# Altium PCB psb_mosdriver.PcbDoc
Units mm, origin at the board's own origin, x right, y up, seen from the top; angles counter-clockwise.
Board outline 92.9 x 66.54 mm, 2 copper layers (Top Layer, Bottom Layer); 20 components, 15 nets, 59 pads, 4 vias.
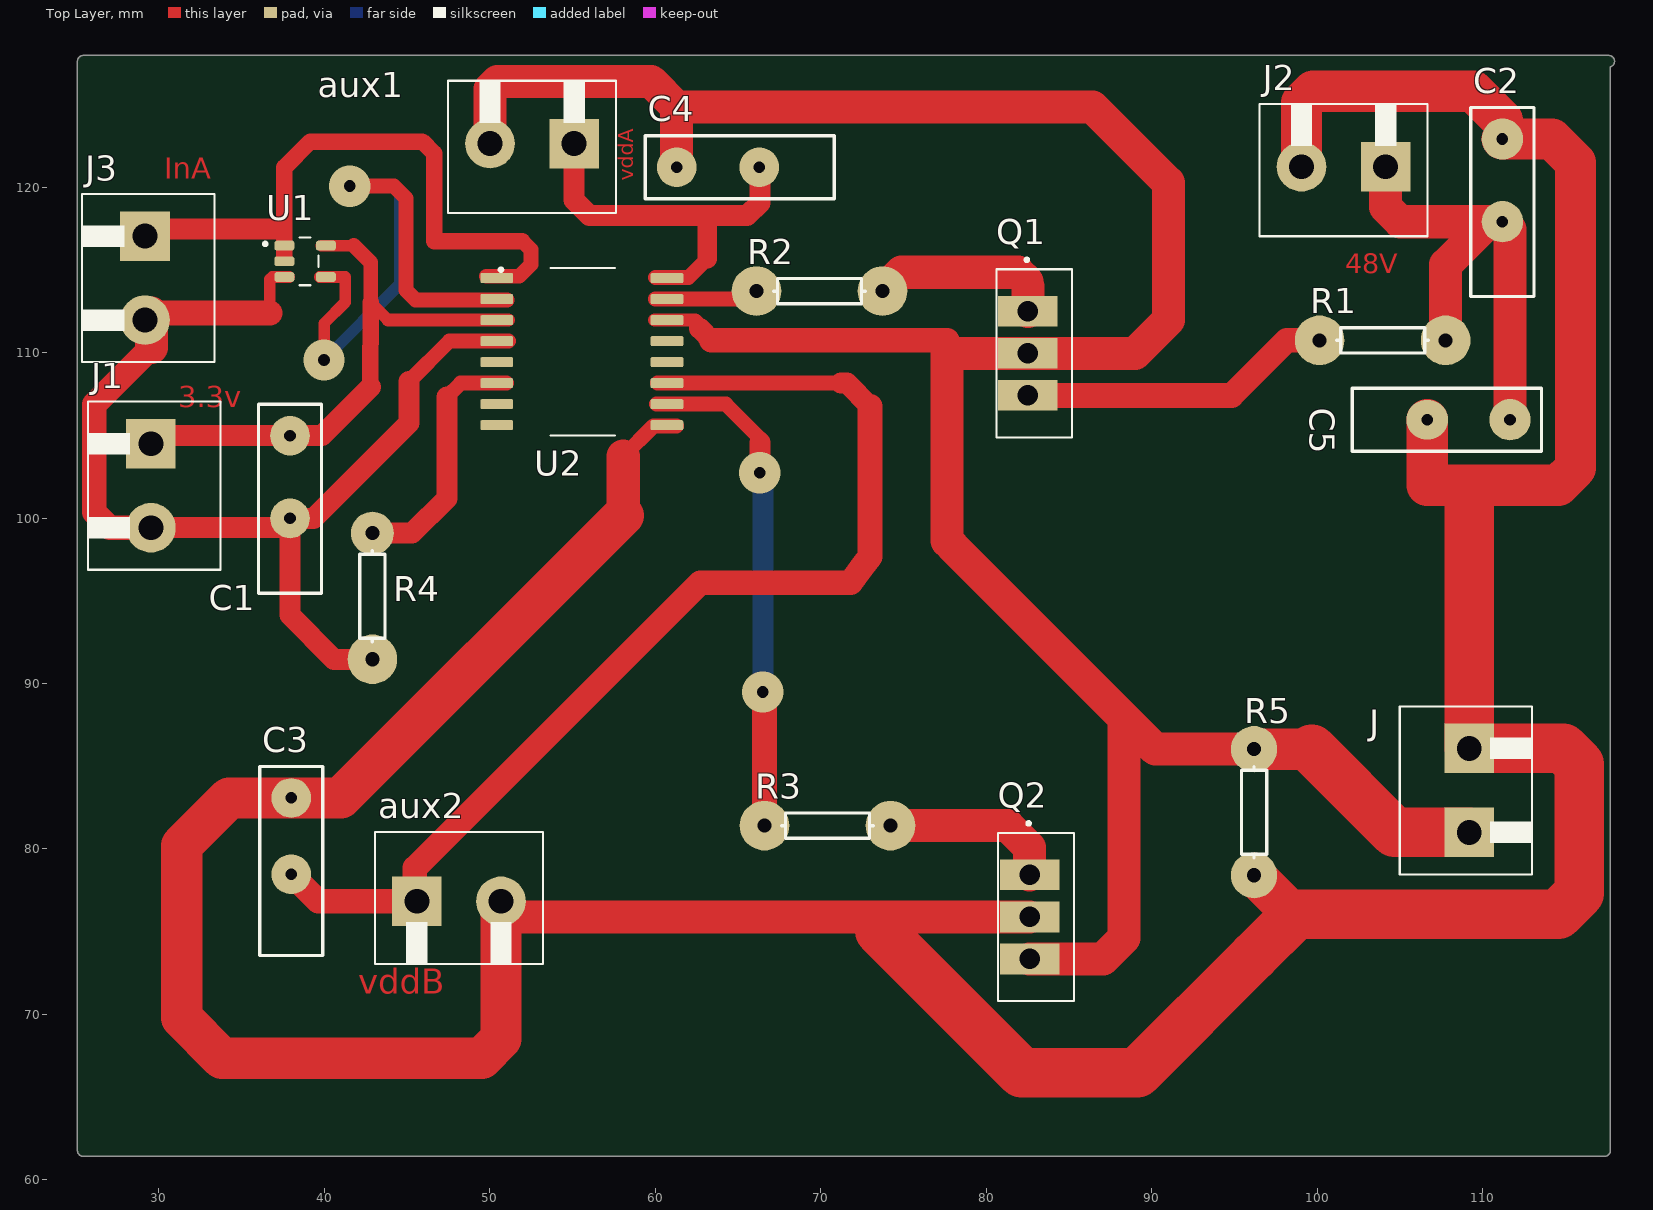
[diagram p0: Top Layer view]
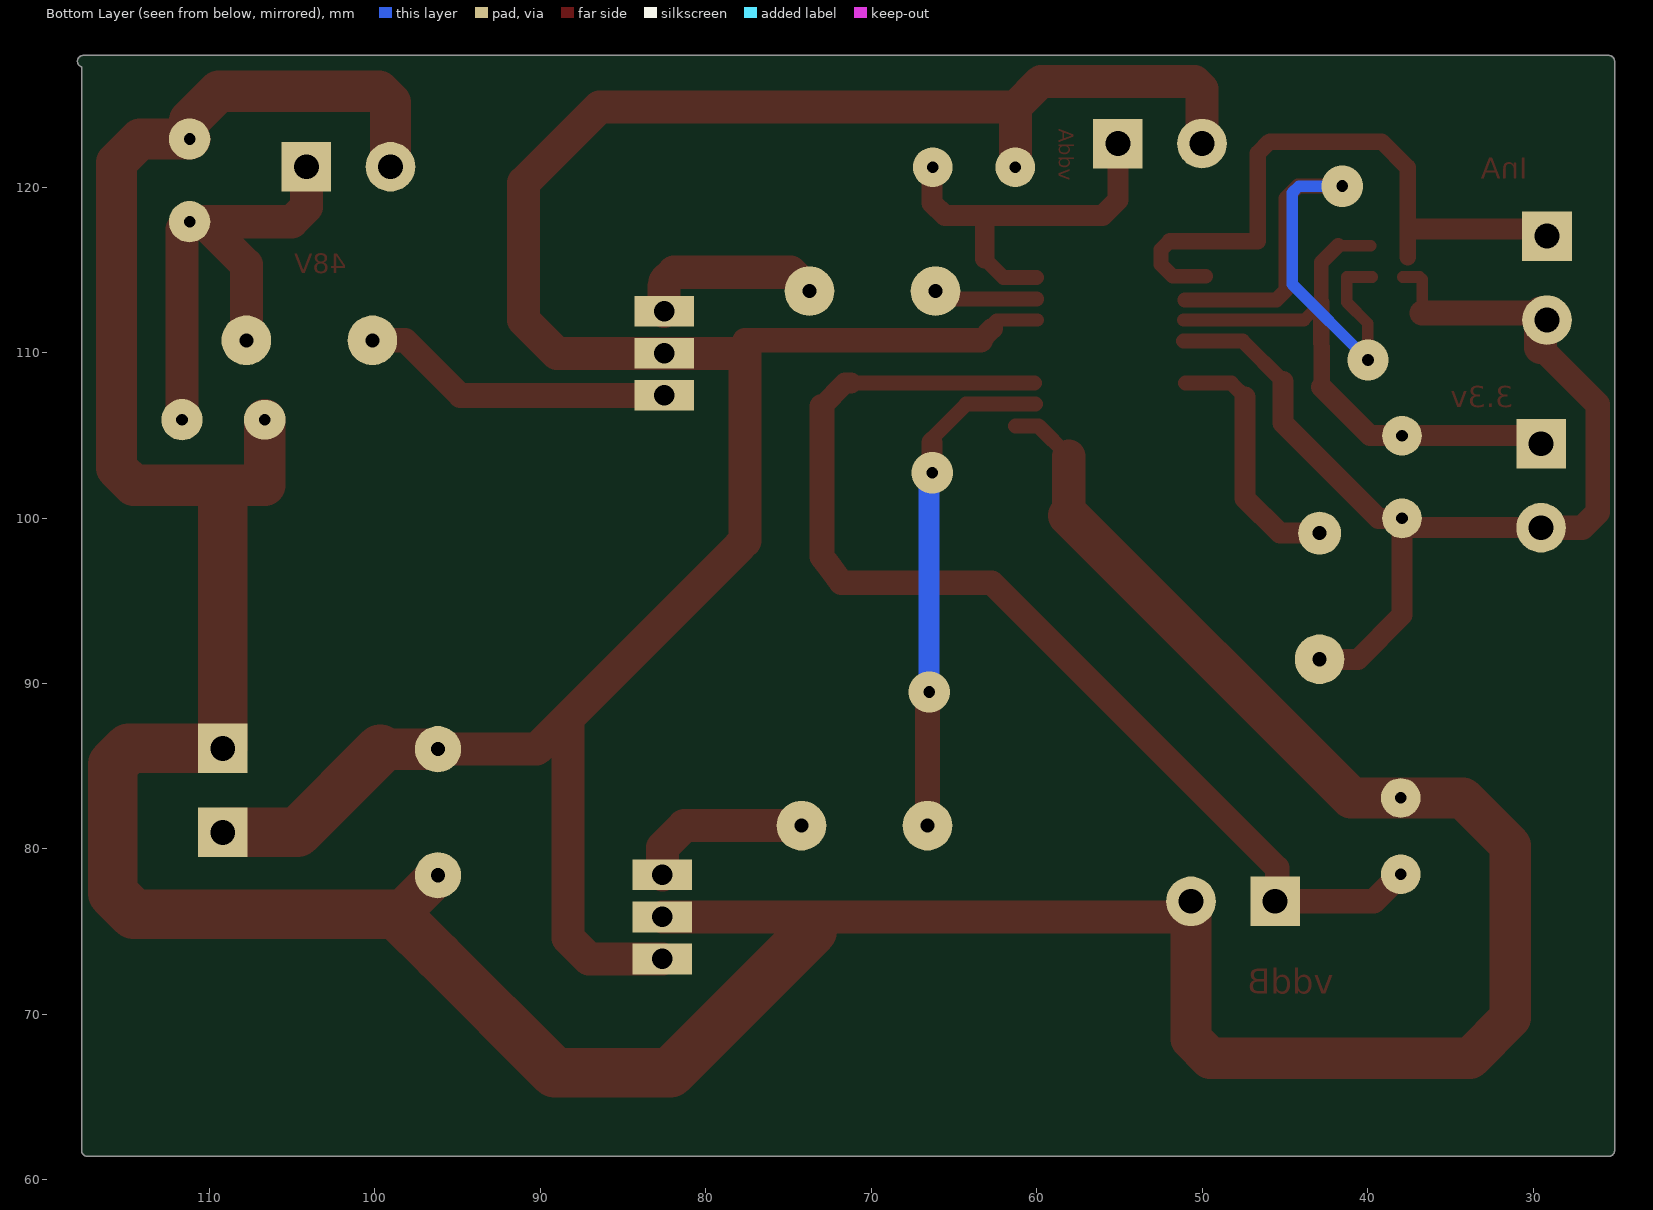
[diagram p1: Bottom Layer view, seen from below]

## Layer stack, top to bottom
Top Solder: solder mask 0.0102, Solder Resist, Dk 3.5
Top Layer: signal copper 0.0356
Dielectric 1: dielectric 0.32, FR-4, Dk 4.8
Bottom Layer: signal copper 0.0356
Bottom Solder: solder mask 0.0102, Solder Resist, Dk 3.5

## Board outline
25.425,61.422 cw(c25.425,61.773) 25.075,61.773 25.075,127.61 cw(c25.425,127.61) 25.425,127.96 117.627,127.96 cw(c117.627,127.61) 117.978,127.61 cw(c117.627,127.61) 117.724,127.273 117.724,61.773 cw(c117.373,61.773) 117.373,61.422

## Design rules (kind name [scope] priority, off if disabled: settings)
Clearance [All] p1: gap=0.254
PolygonConnect [All] p1: connectstyle=Relief reliefconductorwidth=0.254 reliefentries=4 polygonreliefangle="90 Angle" airgapwidth=0.254
RoutingVias [All] p1: holewidth=0.711 width=1.27 viastyle="Through Hole" minholewidth=0.711 minwidth=1.27 maxholewidth=0.711 maxwidth=1.27
SolderMaskExpansion [All] p1: expansion=0.102
Width [All] p1: maxlimit=3.5 minlimit=0.7 preferedwidth=0.7
30 further rules are at their usual default settings.

## Components (designator, comment, footprint, x,y, rotation, side; value= is the part's Value field where it differs from the comment)
aux1 "1760510000" 1760490000#1 55.093,122.631 r180 top
aux2 "1760510000" 1760490000#1 45.593,76.835 r0 top
C1 "Cap" RAD-0.3#1 37.922,101.168 r90 top
C2 "470uF" RAD-0.3#2 111.201,119.101 r270 top
C3 "1uF" RAD-0.3#3 37.998,79.273 r270 top
C4 "1uF" RAD-0.3#4 65.1,121.209 r0 top
C5 "Cap" RAD-0.3#5 107.848,105.943 r0 top
J "1760510000" 1760490000#2 109.195,81.001 r90 top
J1 "1760510000" 1760490000#1 29.515,104.496 r270 top
J2 "1760510000" 1760490000#1 104.14,121.234 r180 top
J3 "1760510000" 1760490000#1 29.159,117.043 r270 top
Q1 "mosfetss" tph3206_powmos 82.525,109.957 r270 top
Q2 "mosfetss" tph3206_powmos 82.626,75.895 r270 top locked
R1 "Res1" AXIAL-0.3#1 103.962,110.744 r0 top
R2 "Res1" AXIAL-0.3#1 69.926,113.716 r180 top
R3 "Res1" AXIAL-0.3#1 70.409,81.407 r180 top
R4 "Res1" AXIAL-0.3#2 42.901,95.275 r90 top
R5 "Res1" AXIAL-0.3#3 96.19,82.22 r90 top
U1 "SN74LVC1G00DBVR" SOT95P280X145-5N 38.837,115.519 r0 top locked
U2 "surface mount" 2eds8265h_pcb 55.626,110.185 r0 top

## Footprints (in the part's own frame and the unit in brackets; to place one, negate y for a bottom-side part, rotate by r counter-clockwise, add the part's x,y. Pads: shape width x height; smd on the part's side, far side on the other; paste and mask are expansions set on the pad)
2eds8265h_pcb [mm]
  rrect25% 1.97x0.6 smd: 1(-5.207,4.318) 2(-5.207,3.048) 3(-5.207,1.778) 4(-5.207,0.508) 5(-5.207,-0.762) 6(-5.207,-2.032) 7(-5.207,-3.302) 8(-5.207,-4.572) 9(5.08,-4.572) 10(5.08,-3.302) 11(5.08,-2.032) 12(5.08,-0.762) 13(5.08,0.508) 14(5.08,1.778) 15(5.08,3.048) 16(5.08,4.318)
  silkscreen extent -5.05,-5.19 1.95,4.94, body extent -5.15,-5.28 5.15,5.02, height 2.65
1760490000#1 [mm]
  rect 3x3 hole 1.5: 1(0,0)
  round 3 hole 1.5: 2(5.08,0)
  silkscreen extent -2.54,-3.81 7.62,4.2
1760490000#2 [mm]
  rect 3x3 hole 1.5: 1(0,0) 2(5.08,0)
  silkscreen extent -2.54,-3.81 7.62,4.2
AXIAL-0.3#1 [mm] "Axial Device, Thru-Hole; 2 Leads; 0.3 in Pin Spacing"
  round 3 hole 0.85: 1(-3.81,0) 2(3.81,0)
  silkscreen extent -2.77,-0.76 2.77,0.76
AXIAL-0.3#2 [mm] "Axial Device, Thru-Hole; 2 Leads; 0.3 in Pin Spacing"
  round 3 hole 0.85: 1(-3.81,0)
  round 2.6 hole 0.85: 2(3.81,0)
  silkscreen extent -2.77,-0.76 2.77,0.76
AXIAL-0.3#3 [mm] "Axial Device, Thru-Hole; 2 Leads; 0.3 in Pin Spacing"
  round 2.8 hole 0.85: 1(-3.81,0) 2(3.81,0)
  silkscreen extent -2.77,-0.76 2.77,0.76
RAD-0.3#1 [mm] "Radial Cap, Thru-Hole; 2 Leads; 0.3 in Pin Spacing"
  round 2.4 hole 0.7: 1(-1.19,0) 2(3.81,0)
  silkscreen extent -5.71,-1.91 5.71,1.91
RAD-0.3#2 [mm] "Radial Cap, Thru-Hole; 2 Leads; 0.3 in Pin Spacing"
  round 2.5 hole 0.7: 1(-3.81,0) 2(1.19,0)
  silkscreen extent -5.71,-1.91 5.71,1.91
RAD-0.3#3 [mm] "Radial Cap, Thru-Hole; 2 Leads; 0.3 in Pin Spacing"
  round 2.4 hole 0.7: 1(-3.81,0) 2(0.81,0)
  silkscreen extent -5.71,-1.91 5.71,1.91
RAD-0.3#4 [mm] "Radial Cap, Thru-Hole; 2 Leads; 0.3 in Pin Spacing"
  round 2.4 hole 0.7: 1(-3.81,0) 2(1.19,0)
  silkscreen extent -5.71,-1.91 5.71,1.91
RAD-0.3#5 [mm] "Radial Cap, Thru-Hole; 2 Leads; 0.3 in Pin Spacing"
  oval 2.5x2.4 hole 0.7: 1(-1.19,0)
  round 2.5 hole 0.7: 2(3.81,0)
  silkscreen extent -5.71,-1.91 5.71,1.91
SOT95P280X145-5N [mm]
  rrect50% 1.21x0.59 smd: 1(-1.255,0.95) 2(-1.255,0) 3(-1.255,-0.95) 4(1.255,-0.95) 5(1.255,0.95)
  silkscreen extent -2.51,-1.45 0.8,1.45
tph3206_powmos [mm]
  rect 1.86x3.6 hole 1.24: 1(-2.54,0) 2(0,0) 3(2.54,0)
  silkscreen extent -5.75,-1.91 5.08,2.67

## Part data
aux1 aux2 J J1 J2 J3: "2 Position Wire to Board Terminal Block Horizontal with Board 0.200 _5.08mm_ Through Hole"
C1 C5: "Capacitor"
C2 C3 C4: library part Cap, "Capacitor"
R1 R2 R3 R4 R5: "Resistor"
U1: "Single 2 Input Positive NAND Gate 5-SOT-23 -40 to 125"
U2: library part Component_1, "DSO-16 socket surface mount"

## Via types
v1: diameter 2.5, hole 0.711, Top Layer to Bottom Layer, 4 vias

## Nets (pads, with @x,y where several pads share a name; then routed paths per layer and width w, separated by ;. In a path a pad name is that pad's centre, name@x,y a point inside that pad or via, vN(x,y) a via of type N, cw(c..) or ccw(c..) an arc to the next point about the centre after c; other vN are vias at no path point)
3.3V: C1.2 J1.1 U1.5 U2.3 | length 34.4
  Top Layer w0.7: U1.5@39.802,116.469 41.773,116.469 ; 42.799,113.03 43.866,111.963
  Top Layer w0.8: 43.866,111.963 U2.3@51.13,111.963
  Top Layer w0.9: 41.773,116.469 42.799,115.443 42.799,113.03
  Top Layer w1: 42.774,107.899 42.799,113.03
  Top Layer w1.27: J1.1 29.997,104.978 C1.2 39.853,104.978 42.799,107.925
48V: C2.2 C5.2 J2.1 R1.2 | length 31.1
  Top Layer w1.5: C2.2 C2.2@111.658,117.454
  Top Layer w2: J2.1 104.14,118.796 105.025,117.911 C2.2 110.367,117.911 107.772,115.316 R1.2 ; C5.2 C2.2@111.658,117.454
AUX12V: aux1.1 C4.2 U2.16 | length 23.7
  Top Layer w0.9: U2.16@60.02,114.529 62.001,114.529 63.144,115.672
  Top Layer w1.2: 63.144,115.672 63.144,118.288
  Top Layer w1.27: aux1.1 55.093,119.228 56.032,118.288 63.144,118.288 65.557,118.288 66.316,119.046 C4.2@66.316,121.209
AUX12V+: aux2.1 C3.2 U2.11 | length 68.3
  Top Layer w0.7: aux2.1@45.466,76.962 aux2.1
  Top Layer w0.9: U2.11@60.122,108.153 71.222,108.153
  Top Layer w1.27: 71.222,108.153 71.577,108.153 72.974,106.756
  Top Layer w1.5: C3.2 39.627,76.835 aux2.1 ; aux2.1@45.466,76.962 45.466,78.842 62.713,96.088 71.793,96.088 72.014,96.383 72.654,97.236 72.974,97.663 72.974,106.756
GND: C1.1 J1.2 J3.2 R4.1 U1.3 U2.4 | length 67.4
  Top Layer w0.7: 36.703,112.395 36.703,114.427 36.845,114.569 U1.3@37.871,114.569
  Top Layer w0.9: 45.11,108.255 47.549,110.693 U2.4@51.13,110.693
  Top Layer w1.27: J1.2 37.36,99.416 C1.1 ; R4.1 40.589,91.465 37.922,94.132 C1.1 ; 45.11,108.255 45.11,105.74 39.348,99.978 C1.1
  Top Layer w1.5: J1.2 27.026,99.416 26.086,100.355 26.086,106.858 29.54,110.312 ; J3.2@29.54,112.395 36.703,112.395
  Top Layer w2: 29.54,110.312 J3.2@29.54,112.395
GND1: aux1.2 C4.1 J.1 Q1.2 Q2.3 R5.2 U2.14 | length 161
  Top Layer w0.8: U2.14@59.969,111.963 62.433,111.963 62.687,111.709
  Top Layer w1.27: 62.687,111.455 63.398,110.744 ; 77.622,98.628 77.953,98.298
  Top Layer w1.5: 63.398,110.744 77.622,110.744
  Top Layer w2: aux1.2 50.013,125.933 50.47,126.39 59.741,126.39 61.29,124.841 ; C4.1 61.29,124.841 ; 77.622,98.628 77.622,109.957 Q1.2 89.002,109.957 91.008,111.963 91.008,120.269 86.436,124.841 61.29,124.841 ; 77.953,98.298 88.341,87.909 ; Q2.3 87.071,73.355 88.341,74.625 88.341,87.909 ; R5.2 90.221,86.03 88.341,87.909
  Top Layer w2.5: R5.2 99.67,86.03
  Top Layer w3: 99.67,86.03 104.699,81.001 J.1
GND2: aux2.2 C2.1 C3.1 C5.1 J2.2 J.2 Q2.2 R5.1 U2.9 | length 253.6
  Top Layer w0.9: 58.064,103.734 59.893,105.562 U2.9@61.29,105.562
  Top Layer w1.5: aux2.2 aux2.2@51.613,75.895 ; C2.1 C2.1@111.201,124.054
  Top Layer w2: aux2.2@51.613,75.895 Q2.2 ; 58.064,100.152 58.064,103.734
  Top Layer w2.5: aux2.2 50.673,68.529 49.505,67.361 33.807,67.361 31.369,69.799 31.369,80.213 34.239,83.083 C3.1 40.996,83.083 58.064,100.152 ; R5.1 98.552,76.048 98.552,75.895 ; J2.2 99.06,125.095 99.771,125.806 109.449,125.806 C2.1@111.201,124.054 ; C5.1 106.658,101.981 114.579,101.981 115.621,103.022 115.621,121.488 114.198,122.911 C2.1
  Top Layer w3: 73.558,75.057 75.705,72.911 79.997,68.618 82.144,66.472 89.129,66.472 96.19,73.533 98.552,75.895 ; 98.552,76.048 114.579,76.048 115.849,77.318 115.849,85.115 114.884,86.081 J.2 109.195,101.676
INA: J3.1 U1.1 U1.2 U2.1 | length 38.6
  Top Layer w0.9: U2.1@49.784,114.615 51.775,114.615 52.476,115.316 52.476,116.23 51.968,116.738
  Top Layer w1: U1.2@37.582,115.753 U1.1 37.582,121.198 39.141,122.758 45.923,122.758 46.634,122.047 46.634,116.738 51.968,116.738
  Top Layer w1.27: J3.1@29.54,117.475 37.404,117.475
INB: U1.4 U2.2 | length 38.2
  Top Layer w0.7: U1.4@39.726,114.569 41.26,114.569 41.26,113.04 39.98,111.76 v1(39.98,109.55)
  Top Layer w0.9: v1(41.529,120.066) 44.196,120.066 44.933,119.329 44.933,113.767 45.517,113.182 U2.2@51.054,113.182
  Bottom Layer w0.7: v1@40.284,109.55 v1(39.98,109.55) 44.552,114.122 44.552,119.659 44.145,120.066 v1(41.529,120.066)
NetQ1_1: Q1.1 R2.1 | length 10.9
  Top Layer w2: R2.1 74.879,114.859 81.915,114.859 82.474,114.3 ; Q1.1 82.525,113.995
NetQ1_3: Q1.3 R1.1 | length 19
  Top Layer w1.5: Q1.3 94.844,107.417 98.171,110.744 R1.1
NetQ2_1: Q2.1 R3.1 | length 10.6
  Top Layer w2: R3.1 81.305,81.407 82.626,80.086 Q2.1
NetR2_2: R2.2 U2.15 | length 6.3
  Top Layer w0.9: U2.15@59.995,113.233 R2.2@65.634,113.233
  Top Layer w1: R2.2@65.634,113.233 R2.2
NetR3_2: R3.2 U2.10 | length 33.8
  Top Layer w0.7: 66.497,86.284 v1(66.497,89.484) v1@66.599,89.383
  Top Layer w0.9: U2.10@60.071,106.883 64.262,106.883 66.319,104.826 66.319,104.572
  Top Layer w1.27: v1(66.319,102.743) 66.319,104.572
  Top Layer w1.5: R3.2 v1@66.599,89.383
  Bottom Layer w0.7: v1(66.319,102.743) v1@66.396,102.667
  Bottom Layer w1.27: v1@66.396,102.667 66.497,102.565 v1(66.497,89.484)
NetR4_2: R4.2 U2.6 | length 15.4
  Top Layer w0.9: 47.396,107.315 48.235,108.153 U2.6@51.003,108.153
  Top Layer w1.27: R4.2 45.288,99.085 47.396,101.194 47.396,107.315
pads on no net: U2.5 U2.7 U2.8 U2.12 U2.13

## Other copper
Top Layer:
  text "InA" at 30.328,120.498 h1.27
  text "vddA" at 58.674,120.396 h0.9 r90
  text "48V" at 101.702,114.808 h1.2
  text "3.3v" at 31.166,106.705 h1.27
  text "vddB" at 42.037,71.247 h1.5